# Altium PCB board6.PcbDoc
Units mil, origin at the board's own origin, x right, y up, seen from the top; angles counter-clockwise.
Board outline 1968.5 x 1181.1 mil, 6 copper layers (Top Layer, Mid-Layer 1, Internal Plane 1, Mid-Layer 3, Mid-Layer 4, Bottom Layer), stack 61.418 mil thick; 3 components, 4 nets, 37 pads, 3 vias.
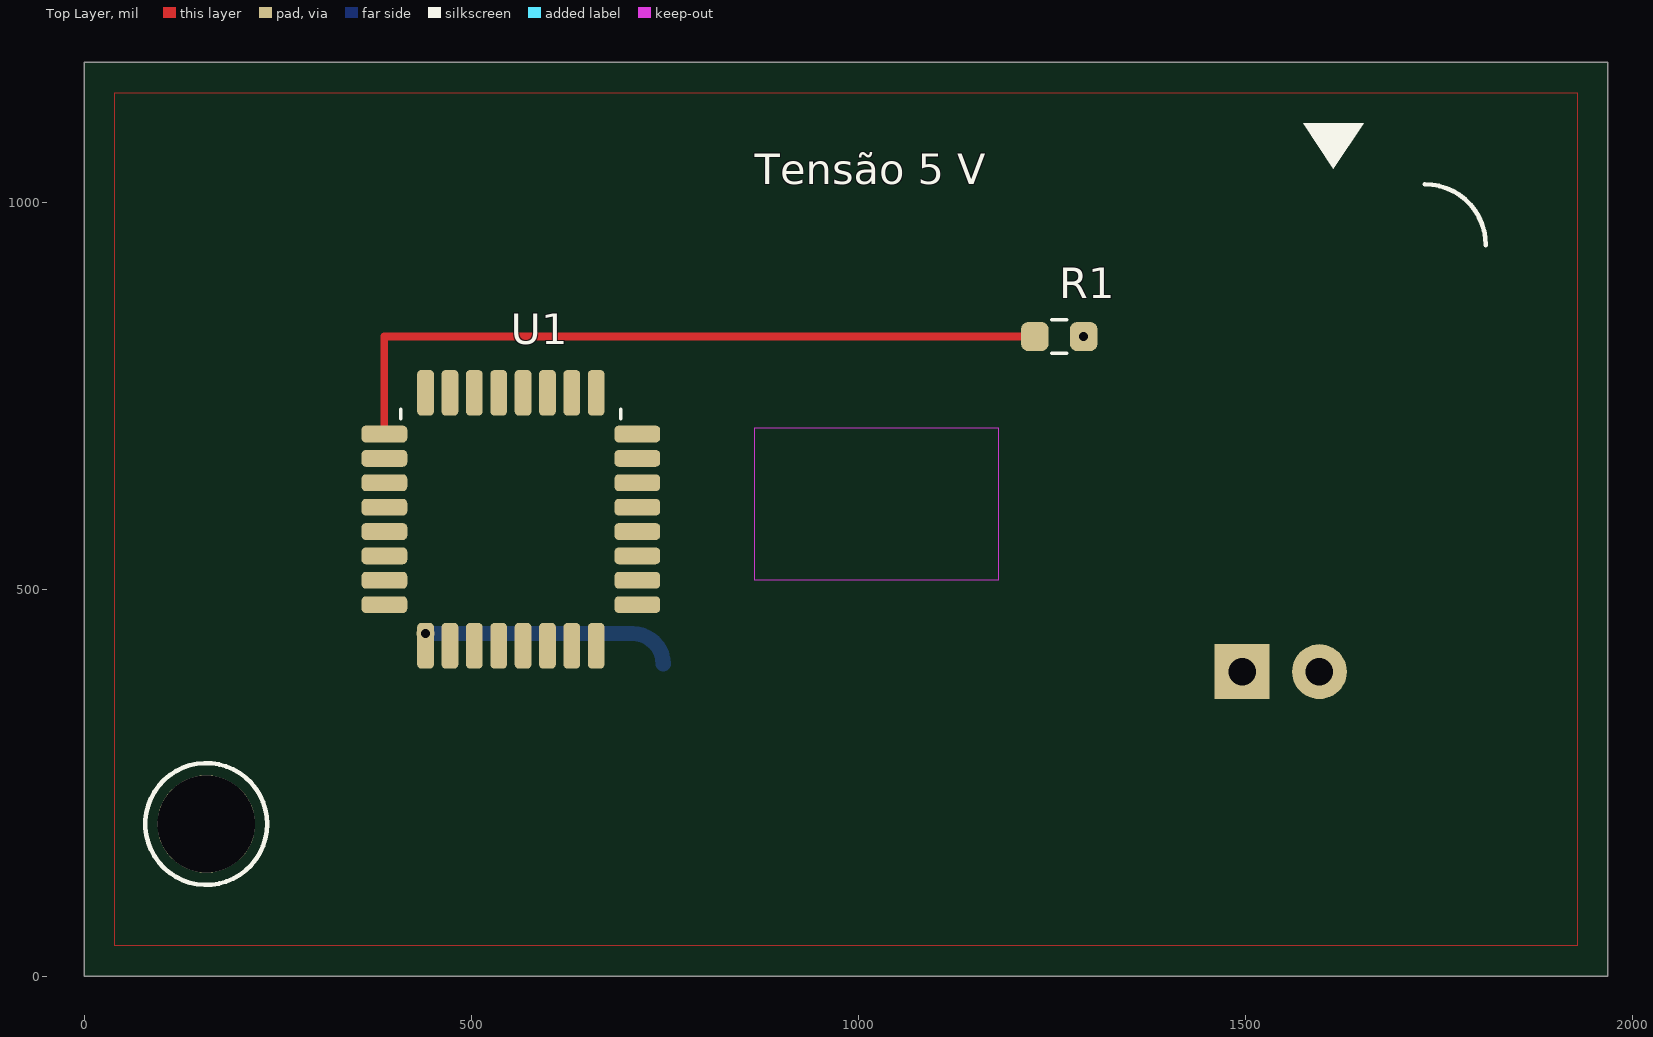
[diagram p0: Top Layer view]
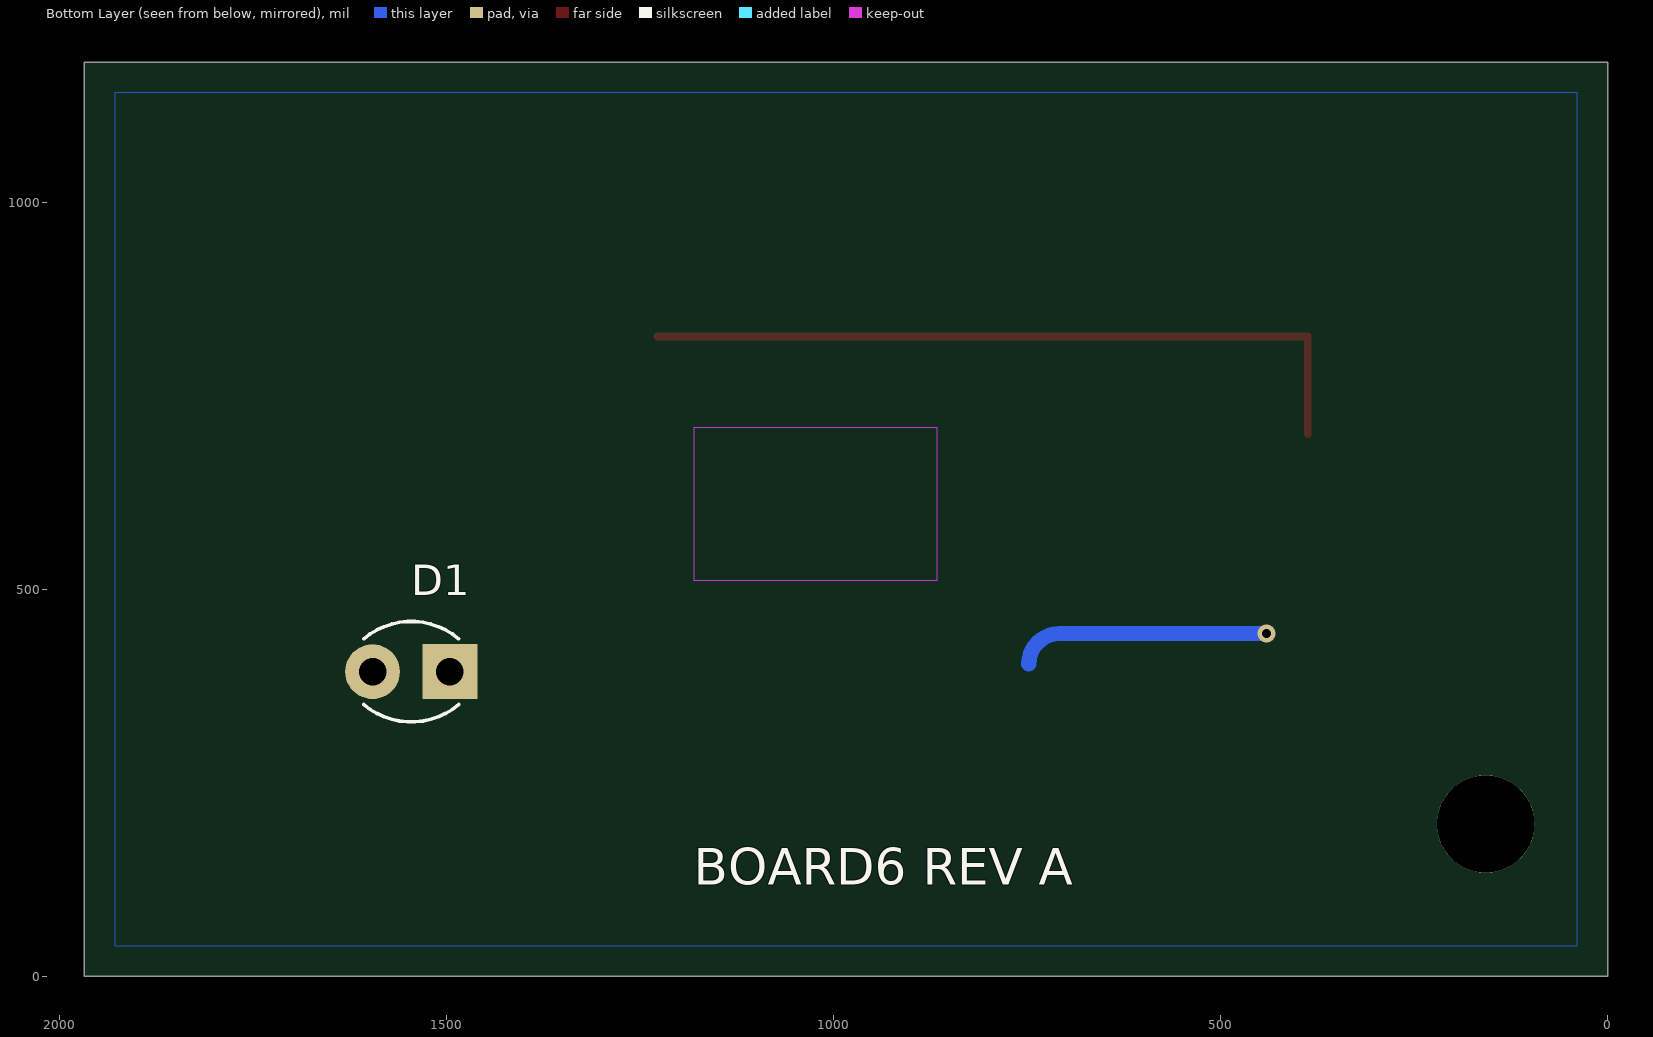
[diagram p1: Bottom Layer view, seen from below]
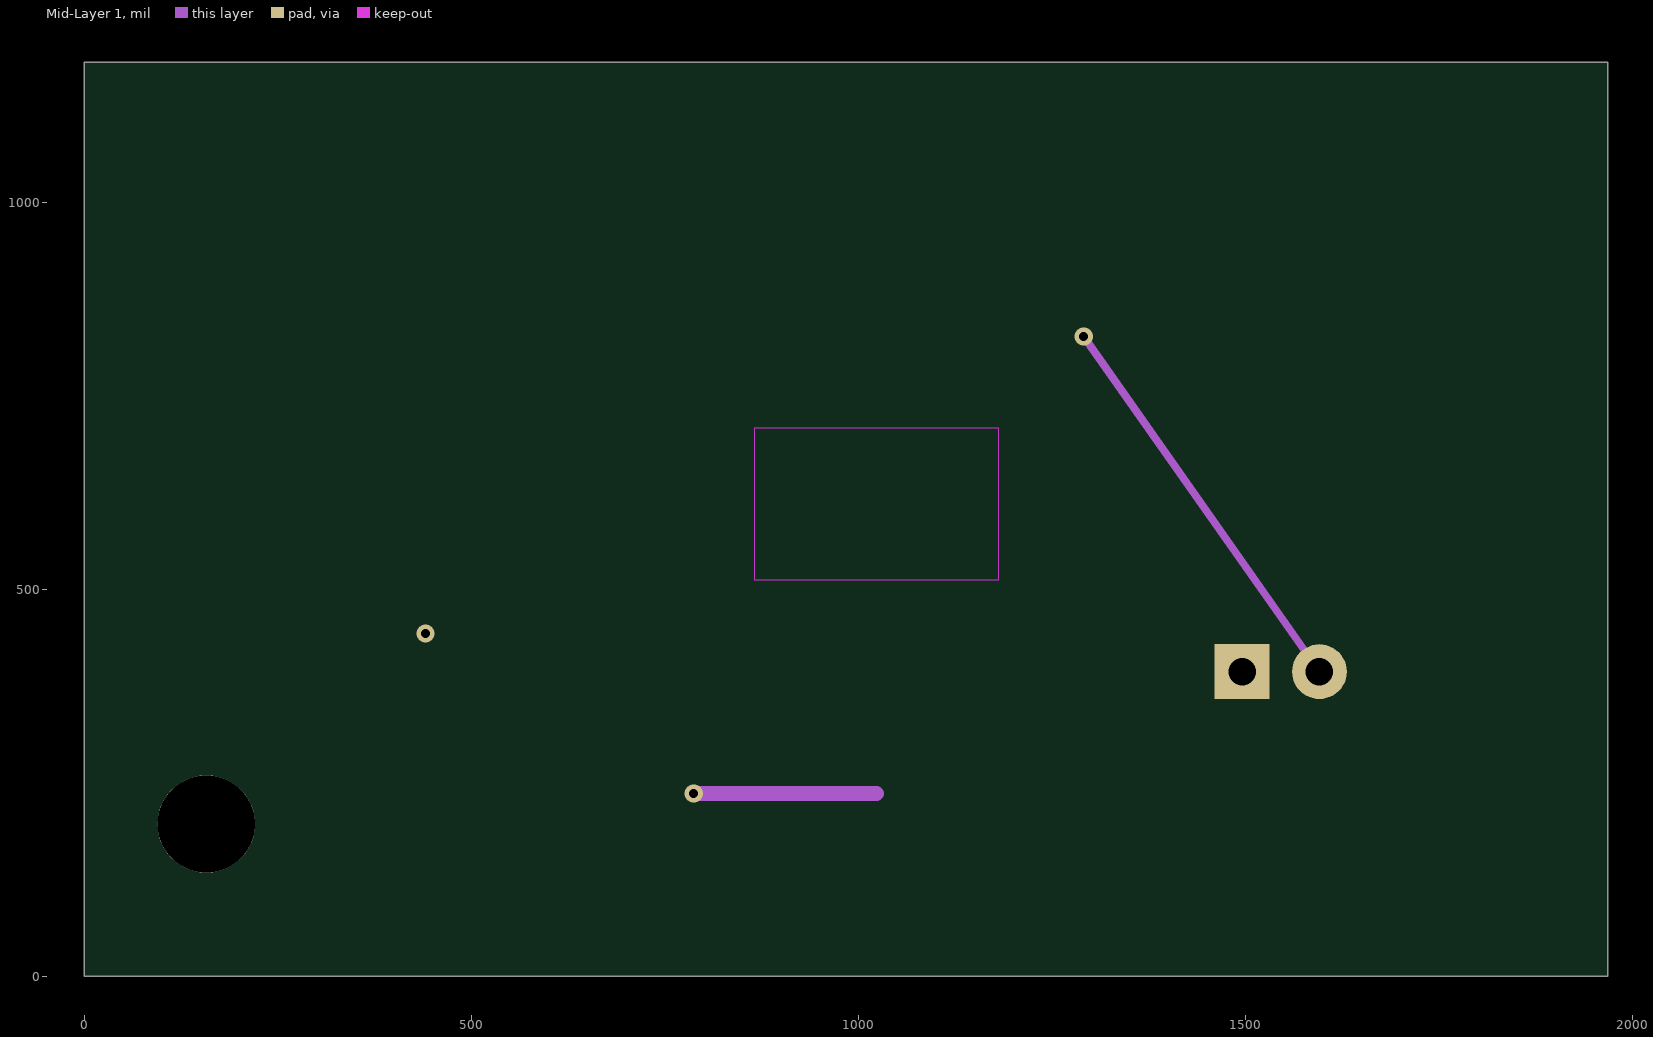
[diagram p2: Mid-Layer 1]
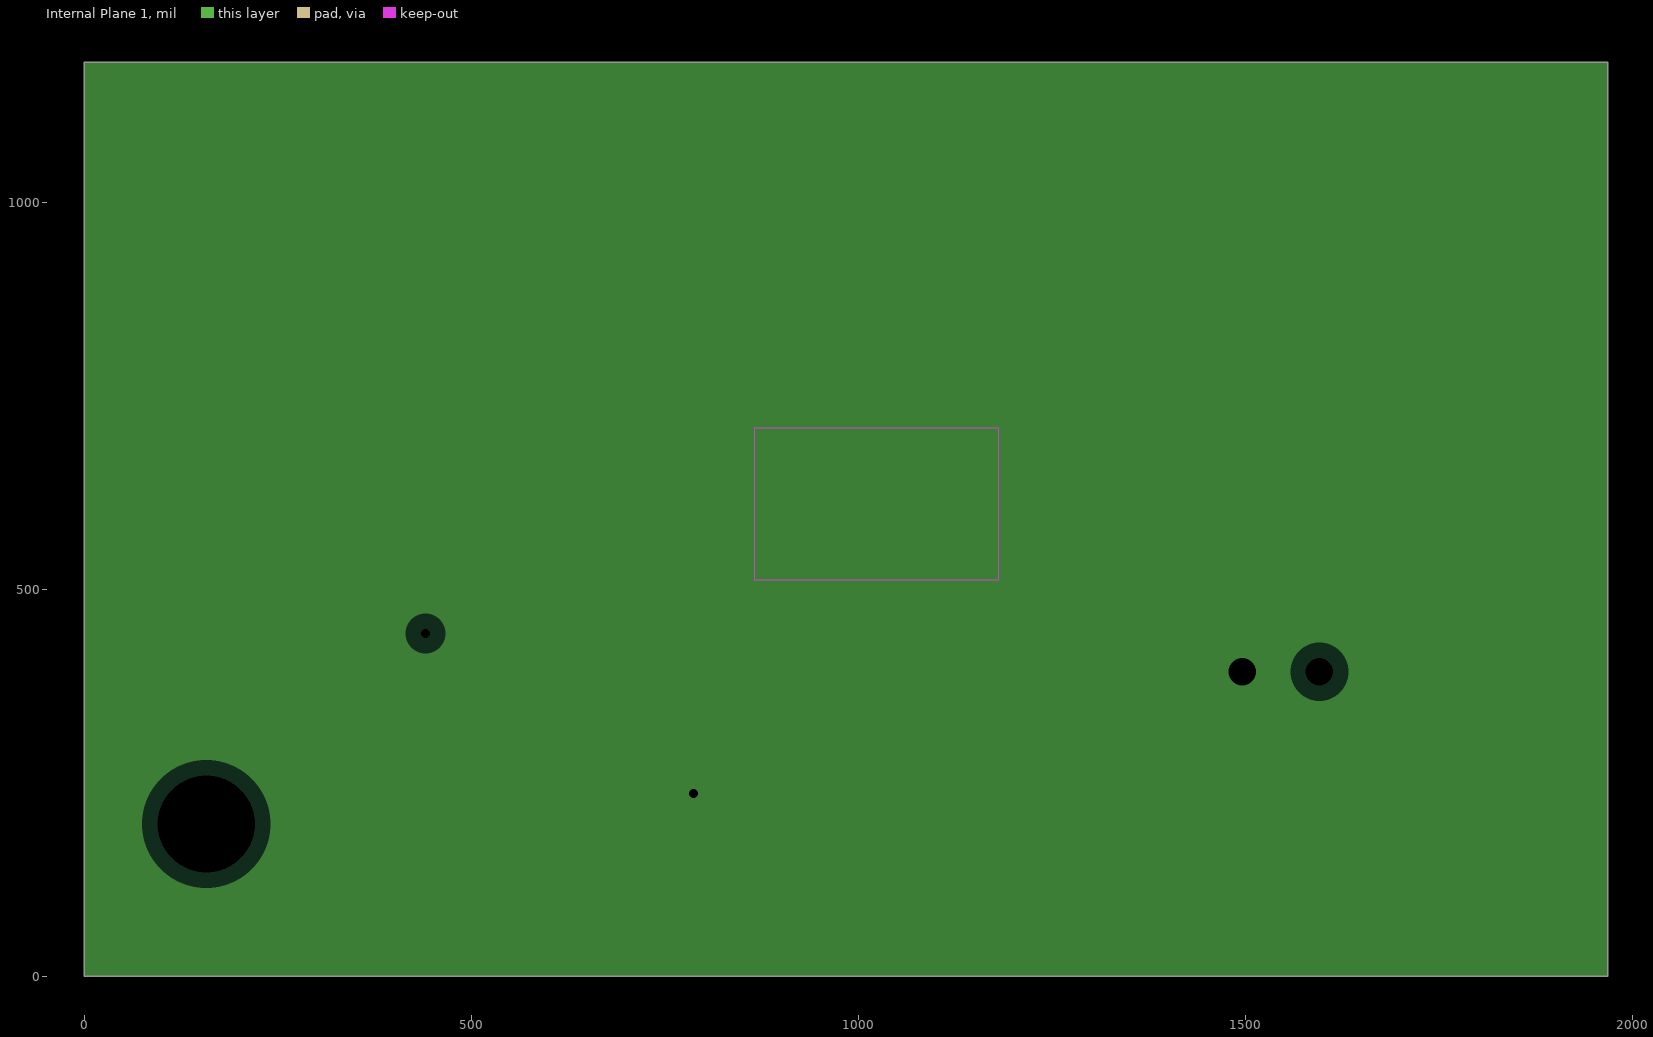
[diagram p3: Internal Plane 1, clearances drawn from the general rule]
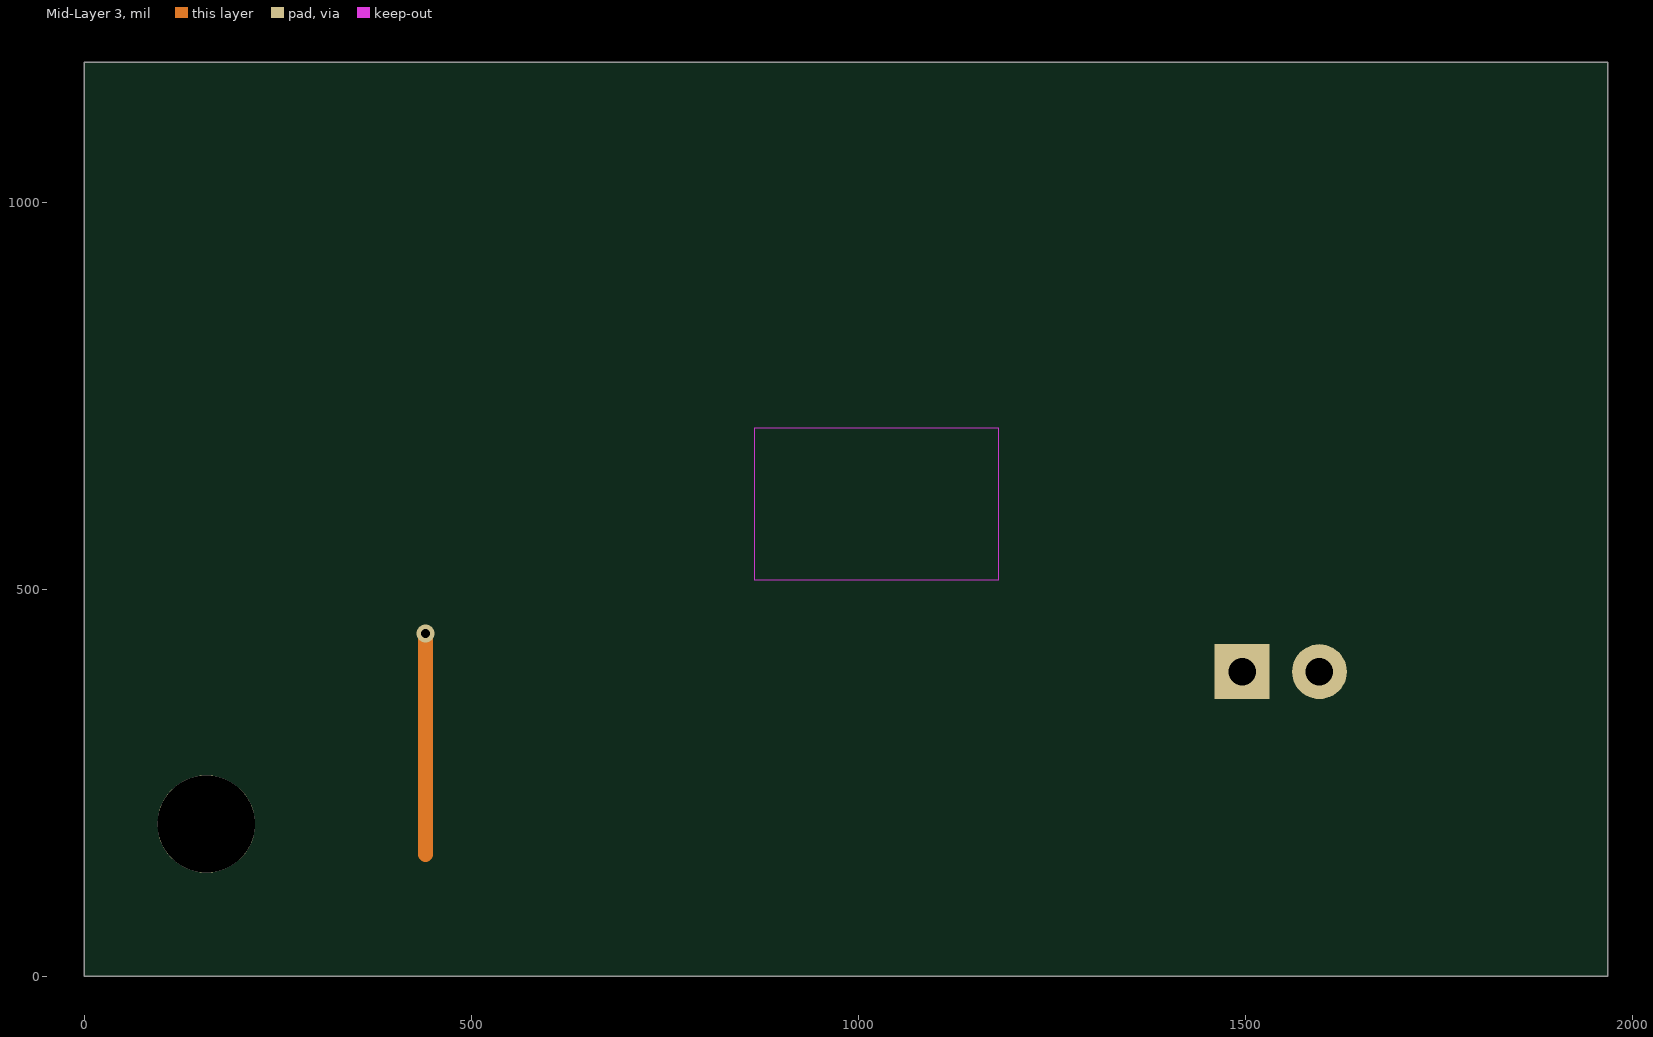
[diagram p4: Mid-Layer 3]
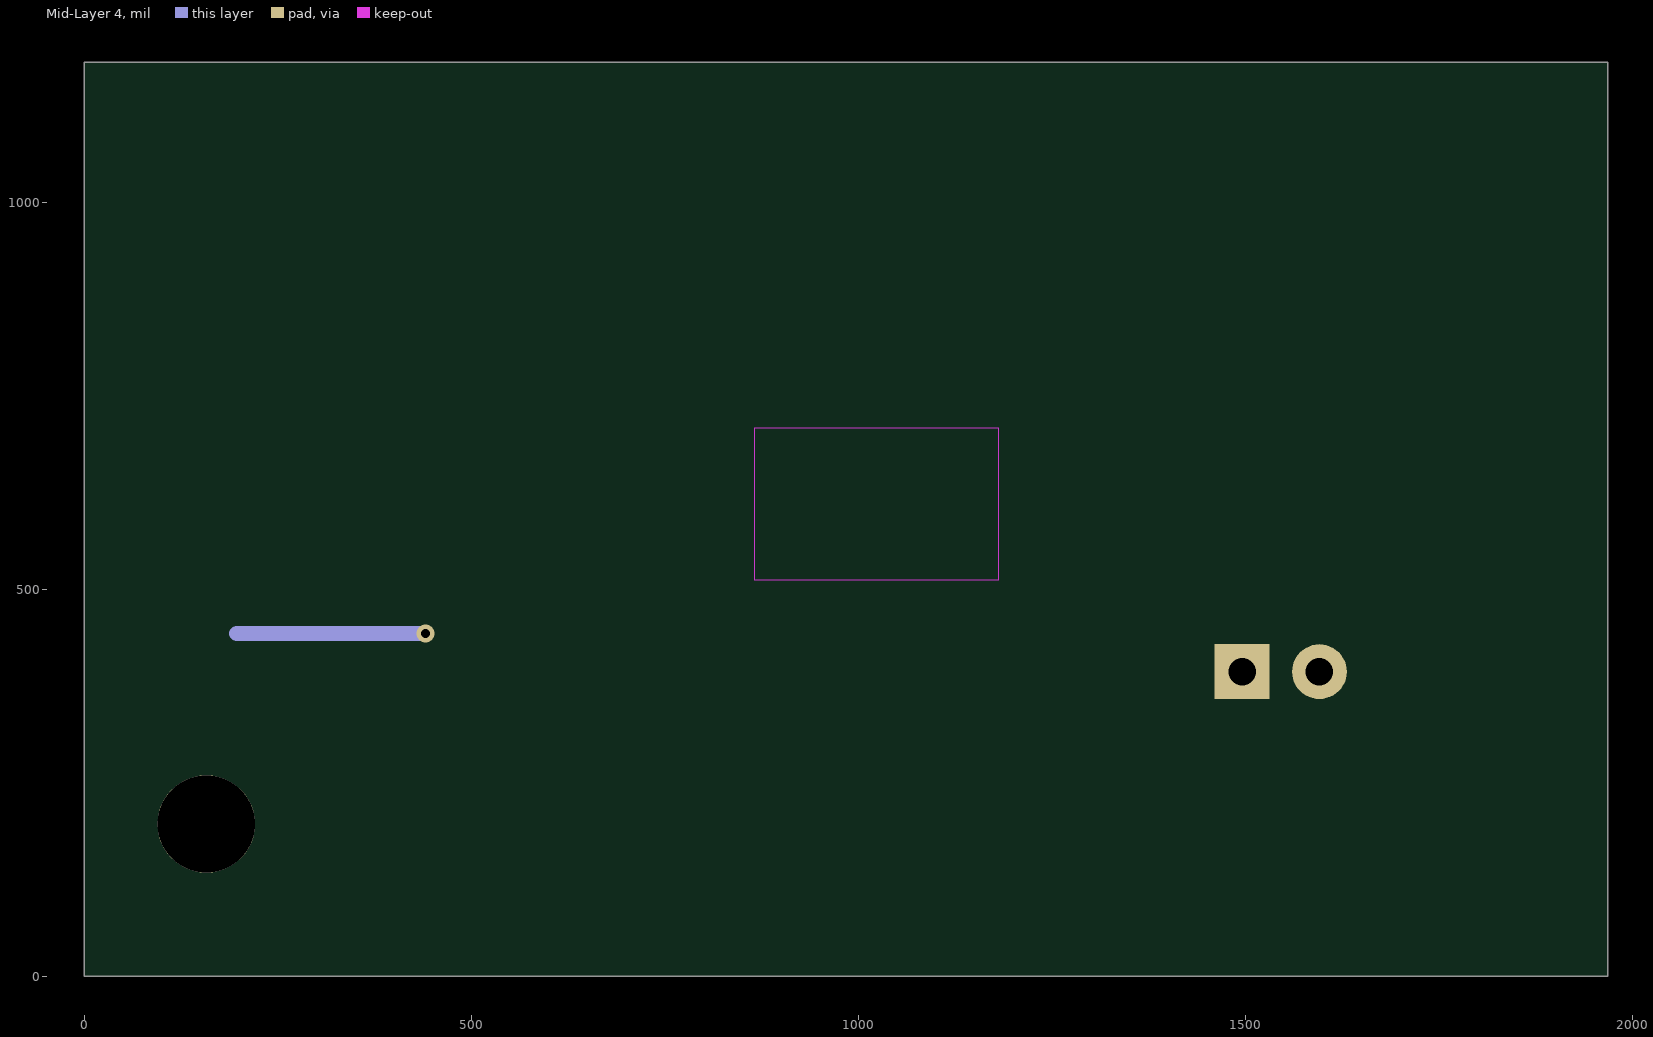
[diagram p5: Mid-Layer 4]

## Layer stack, top to bottom
Top Solder: solder mask 0.4, Solder Resist, Dk 3.5
Top Layer: signal copper 1.378
Dielectric 1: prepreg 4.3307, FR-4 prepreg, Dk 4.2
Mid-Layer 1: signal copper 0.689
Dielectric 2: core 7.874, FR-4 core, Dk 4.5
Internal Plane 1: plane copper 0.689, net GND
Dielectric 3: prepreg 31.4961, FR-4 prepreg, Dk 4.2
Mid-Layer 3: signal copper 0.689
Dielectric 4: core 7.874, FR-4 core, Dk 4.5
Mid-Layer 4: signal copper 0.689
Dielectric 5: prepreg 4.3307, FR-4 prepreg, Dk 4.2
Bottom Layer: signal copper 1.378
Bottom Solder: solder mask 0.4, Solder Resist, Dk 3.5

## Board outline
0,1181.1 1968.5,1181.1 1968.5,0 0,0

## Design rules (kind name [scope] priority, off if disabled: settings)
Clearance Clearance_PWR [InNetClass('PWR')] p1: gap=7.87 ignorepadtopadclearanceinfootprint=FALSE
Clearance [All] p2: gap=7.87 ignorepadtopadclearanceinfootprint=FALSE
RoutingVias [All] p1: holewidth=11.81 width=23.62 viastyle="Through Hole" minholewidth=11.81 minwidth=23.62 maxholewidth=11.81 maxwidth=23.62
Width Width_PWR [InNetClass('PWR')] p1: maxlimit=19.68 minlimit=19.68 preferedwidth=19.68
Width [All] p2: maxlimit=19.68 minlimit=9.84 preferedwidth=9.84

## Classes and differential pairs
net class PWR: GND VIN

## Components (designator, comment, footprint, x,y, rotation, side; value= is the part's Value field where it differs from the comment)
D1 "LED" Mini_LED_THT_3mm 1496.06,393.7 r0 bottom
R1 "330" Mini_R_0603 1259.84,826.77 r0 top
U1 "MCU" Mini_QFP-32_7x7mm_P0.8mm 551.18,590.55 r0 top locked

## Footprints (in the part's own frame and the unit in brackets; to place one, negate y for a bottom-side part, rotate by r counter-clockwise, add the part's x,y. Pads: shape width x height; smd on the part's side, far side on the other; paste and mask are expansions set on the pad)
Mini_LED_THT_3mm [mm]
  rect 1.8x1.8 hole 0.9: 1(0,0)
  round 1.8 hole 0.9: 2(2.54,0)
  silkscreen extent -0.29,-1.65 2.83,1.65
Mini_QFP-32_7x7mm_P0.8mm [mm]
  rrect50% 1.5x0.55 smd: 1(-4.15,2.8) 2(-4.15,2) 3(-4.15,1.2) 4(-4.15,0.4) 5(-4.15,-0.4) 6(-4.15,-1.2) 7(-4.15,-2) 8(-4.15,-2.8) 17(4.15,-2.8) 18(4.15,-2) 19(4.15,-1.2) 20(4.15,-0.4) 21(4.15,0.4) 22(4.15,1.2) 23(4.15,2) 24(4.15,2.8)
  rrect50% 0.55x1.5 smd: 9(-2.8,-4.15) 10(-2,-4.15) 11(-1.2,-4.15) 12(-0.4,-4.15) 13(0.4,-4.15) 14(1.2,-4.15) 15(2,-4.15) 16(2.8,-4.15) 25(2.8,4.15) 26(2,4.15) 27(1.2,4.15) 28(0.4,4.15) 29(-0.4,4.15) 30(-1.2,4.15) 31(-2,4.15) 32(-2.8,4.15)
  silkscreen extent -3.61,3.3 3.61,3.61
Mini_R_0603 [mm]
  rrect50% 0.9x0.95 smd: 1(-0.8,0) 2(0.8,0)
  silkscreen extent -0.25,-0.55 0.25,0.55

## Part data
D1: library part Mini_LED
R1: library part Mini_R
U1: library part Mini_QFP32_IC

## Free pads (board coordinates)
  round 125.98 hole 125.98 unplated: ""(157.48,196.85)

## Via types
v1: diameter 23.62, hole 11.81, Mid-Layer 1 to Internal Plane 1, 1 vias
v2: diameter 23.62, hole 11.81, Top Layer to Mid-Layer 1, 1 vias
v3: diameter 23.62, hole 11.81, Top Layer to Bottom Layer, 1 vias

## Nets (pads, with @x,y where several pads share a name; then routed paths per layer and width w, separated by ;. In a path a pad name is that pad's centre, name@x,y a point inside that pad or via, vN(x,y) a via of type N, cw(c..) or ccw(c..) an arc to the next point about the centre after c; other vN are vias at no path point)
GND: D1.1 U1.10 | length 236.2
  Mid-Layer 1 w19.68: v1(787.4,236.22) 1023.62,236.22
LED_A: D1.2 R1.2 | length 529.5
  Mid-Layer 1 w9.84: v2(1291.34,826.77) D1.2
LED_DRV: R1.1 U1.1 | length 966.5
  Top Layer w9.84: U1.1 387.8,826.77 R1.1
VIN: U1.9 | length 859.1
  Mid-Layer 3 w19.68: 440.94,157.48 v3(440.94,442.91)
  Mid-Layer 4 w19.68: 196.85,442.91 v3(440.94,442.91)
  Bottom Layer w19.68: v3(440.94,442.91) 708.66,442.91 cw(c708.66,403.54) 748.03,403.54
pads on no net: U1.2 U1.3 U1.4 U1.5 U1.6 U1.7 U1.8 U1.11 U1.12 U1.13 U1.14 U1.15 U1.16 U1.17 U1.18 U1.19 U1.20 U1.21 U1.22 U1.23 U1.24 U1.25 U1.26 U1.27 U1.28 U1.29 U1.30 U1.31 U1.32

## Polygon pours and split planes (outlines as drawn)
GND on Top Layer "GND_L01_P000" (solid, remove dead copper, pour order 0): 39.37,1141.73 1929.13,1141.73 1929.13,39.37 39.37,39.37
GND on Bottom Layer "GND_L06_P001" (solid, remove dead copper, pour order 1): 39.37,1141.73 1929.13,1141.73 1929.13,39.37 39.37,39.37

## Keep-outs
Keep-Out Layer:
  region: 866.14,708.66 1181.1,708.66 1181.1,511.81 866.14,511.81

## Silkscreen, mask and mechanical layers (free items; w line width, h text height)
Top Overlay:
  circle w5.91: c157.48,196.85 r78.74
  region: 1574.8,1102.36 1653.54,1102.36 1614.17,1043.31
  lines w5.91: 1732.28,1023.62 cw(c1732.28,944.88) 1811.02,944.88
  text "Tensão 5 V" at 866.14,1023.62 h39.37
Bottom Overlay:
  text "BOARD6 REV A" at 1181.1,118.11 h47.24
Mechanical 13:
  lines w3.94: 78.74,1102.36 472.44,1102.36
  text "ASSEMBLY TOP" at 118.11,78.74 h31.5
Mechanical 14:
  lines w3.94: 1417.32,118.11 1732.28,118.11 1732.28,314.96 1417.32,314.96 1417.32,118.11
  text "BOTTOM" at 1850.39,708.66 h39.37 r90